# Allegro board HI2XXMDK.brd
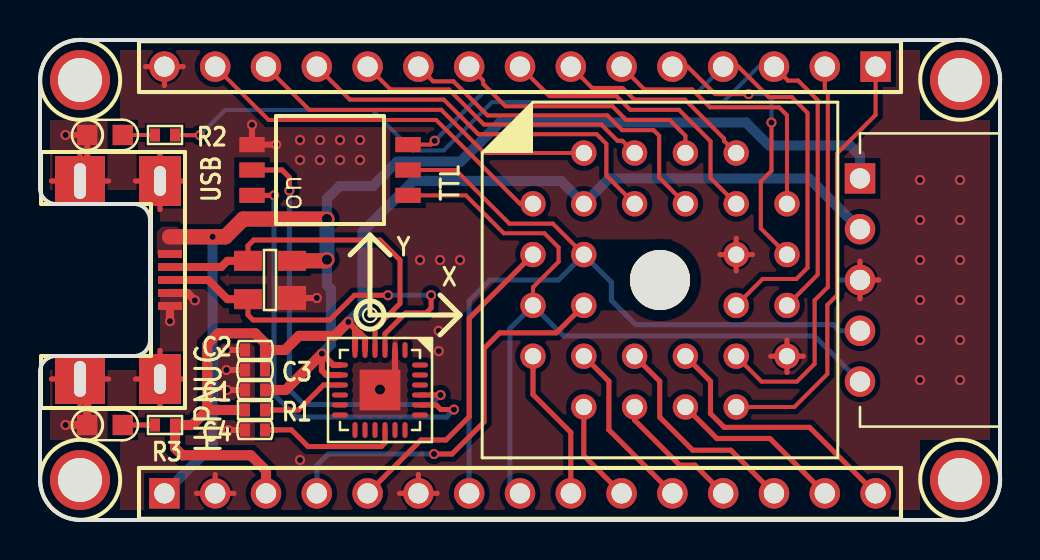
[diagram p0: board, top side]
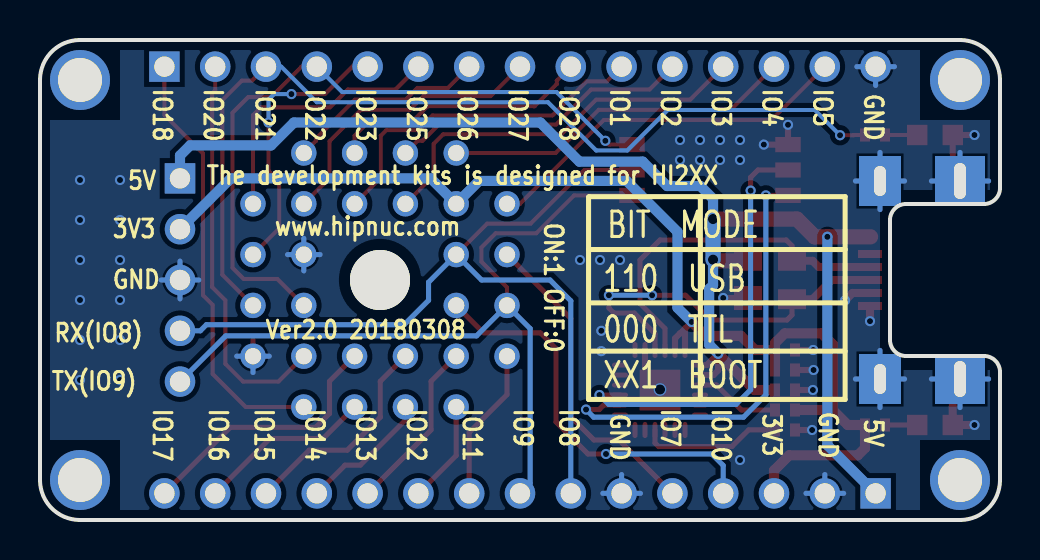
[diagram p1: board, bottom side, seen from below]

Outline 48 x 24 mm; copper layers: TOP, BOTTOM. Coordinates in mm from the lower left corner of the outline.
Outline path: 0,22 arc(0.59,23.41) 2,24 46,24 arc(47.41,23.41) 48,22 48,2 arc(47.41,0.59) 46,0 2,0 arc(0.59,0.59) 0,2 0,7.4 arc(0.23,7.97) 0.8,8.2 4.7,8.2 arc(5.27,8.43) 5.5,9 5.5,15 arc(5.27,15.57) 4.7,15.8 0.8,15.8 arc(0.23,16.03) 0,16.6 0,22

## Placement (name value [footprint] x y rotation side)
C1  4.7uF  [C0402]  10.75 6.5 0 top
C2  0.1uF  [C0402]  10.75 8.5 0 top
C3  4.7uF  [C0402]  10.75 7.5 0 top
C4  4.7uF  [C0402]  10.75 4.5 0 top
D2  GREEN  [LED0603]  3.25 19.25 180 top
D3  SP0503BAHT  [SOT-143]  11.5 12 90 top
D4  RED  [LED0603]  3.25 4.75 180 top
H1  HOLE  [HOLE-2-MM]  46 2 0 top
H2  HOLE  [HOLE-2-MM]  2 22 0 top
H3  HOLE  [HOLE-2-MM]  46 22 0 top
H4  HOLE  [HOLE-2-MM]  2 2 0 top
J1  MICRO_USB  [MICRO-USB-B-476420001]  2 12 270 top
J2  PLCC28  [PLCC28_DIP]  31 12 0 top
J3  CONN PLUG 5  [XH2_54-5P]  41 12 270 top
J4  HEADER 15  [HEADER1X15-2_54MM]  24 1.33 0 top
J5  HEADER 15  [HEADER1X15-2_54MM]  24 22.67 180 top
R1  4.7K  [R0402]  10.75 5.5 180 top
R2  330R  [R0402]  6.25 19.25 180 top
R3  330R  [R0402]  6.25 4.75 180 top
SW1  SW DIP-3  [SMDSW2X3-1_27MM]  14.5 17.5 180 top
U1  CP2104  [QFN-24_4X4MM_P0_5]  17 6.5 270 top

## Library data of the parts
C1-C4 = Capacity_Nonpolarity
D2 D4 = LED
D3 = SP0503BAHT
H1-H4 = HOLE
J1 = MICRO-USB
J2 = PLCC28_DIP
J3 = CONN PLUG 5
J4 J5 = HEADER 15
R1-R3 = Res
SW1 = SW DIP-3
U1 = CP2104

## Footprints (pads in the part's own frame, mm; a bottom-side part is the same pattern mirrored in y, then rotated)
C0402
  rect 0.5x0.65 smd: 1(-0.5,0) 2(0.5,0)
HEADER1X15-2_54MM
  rect 1.524x1.524 hole 1.016: 1(-17.78,0)
  round 1.524 hole 1.016: 2(-15.24,0) 3(-12.7,0) 4(-10.16,0) 5(-7.62,0) 6(-5.08,0) 7(-2.54,0) 8(0,0) 9(2.54,0) 10(5.08,0) 11(7.62,0) 12(10.16,0) 13(12.7,0) 14(15.24,0) 15(17.78,0)
HOLE-2-MM
  round 3 hole 2.2: 1(0,0)
LED0603
  rect 1.016x1.016 smd: 1(-0.889,0) 2(0.889,0)
MICRO-USB-B-476420001
  rect 0.4x1.2 smd: 1(-1.3,4.5) 2(-0.65,4.5) 3(0,4.5) 4(0.65,4.5) 5(1.3,4.5)
  rect 2.5x2.1 hole 1.5x0.6: 6(4.95,4) 9(-4.95,4)
  rect 2.5x2.5 hole 1.8x0.6: 7(4.95,0) 8(-4.95,0)
PLCC28_DIP
  round 3 hole 3.6 unplated: (0,0)
  round 1.27 hole 0.813: 1(1.27,3.81) 2(-1.27,6.35) 3(-1.27,3.81) 4(-3.81,6.35) 5(-6.35,3.81) 6(-3.81,3.81) 7(-6.35,1.27) 8(-3.81,1.27) 9(-6.35,-1.27) 10(-3.81,-1.27) 11(-6.35,-3.81) 12(-3.81,-6.35) 13(-3.81,-3.81) 14(-1.27,-6.35) 15(-1.27,-3.81) 16(1.27,-6.35) 17(1.27,-3.81) 18(3.81,-6.35) 19(6.35,-3.81) 20(3.81,-3.81) 21(6.35,-1.27) 22(3.81,-1.27) 23(6.35,1.27) 24(3.81,1.27) 25(6.35,3.81) 26(3.81,6.35) 27(3.81,3.81) 28(1.27,6.35)
QFN-24_4X4MM_P0_5
  oval 0.8x0.25 smd: 1(-2,1.25) 2(-2,0.75) 3(-2,0.25) 4(-2,-0.25) 5(-2,-0.75) 6(-2,-1.25) 13(2,-1.25) 14(2,-0.75) 15(2,-0.25) 16(2,0.25) 17(2,0.75) 18(2,1.25)
  oval 0.25x0.8 smd: 7(-1.25,-2) 8(-0.75,-2) 9(-0.25,-2) 10(0.25,-2) 11(0.75,-2) 12(1.25,-2) 19(1.25,2) 20(0.75,2) 21(0.25,2) 22(-0.25,2) 23(-0.75,2) 24(-1.25,2)
  rect 2.032x2.032 smd: 25(0,0)
R0402
  rect 0.5x0.65 smd: 1(-0.5,0) 2(0.5,0)
SMDSW2X3-1_27MM
  rect 1.27x0.76 smd: 1(-3.9,1.27) 2(-3.9,0) 3(-3.9,-1.27) 4(3.9,-1.27) 5(3.9,0) 6(3.9,1.27)
SOT-143
  rect 1.2x1.4 smd: 1(-0.9,-1.1)
  rect 1x1.4 smd: 2(0.96,-1.1) 3(0.96,1.1) 4(-0.96,1.1)
XH2_54-5P
  rect 1.524x1.524 hole 1.016: 1(-5.08,0)
  round 1.524 hole 1.016: 2(-2.54,0) 3(0,0) 4(2.54,0) 5(5.08,0)

## Nets
GND: C1.1 C2.1 C3.1 C4.1 D2.2(-) D3.1 D4.2(-) J1.4(ID) J1.5(GND) J1.6 J1.7 J1.8 J1.9 J2.19 J2.24 J3.3 J4.2 J4.6 J5.15 SW1.4(B3) U1.2(GND) U1.25(EPD)
CP2104_RXD: SW1.6(B1) U1.20(RXD)
CP2104_TXD: SW1.5(B2) U1.21(TXD)
DP3V3: C2.2 C3.2 J2.6 J3.2 J4.3 R1.2 R3.1 U1.5(VIO) U1.6(VDD)
DP5V: C1.2 D3.2 J1.1(VBUS) J3.1 J4.1 U1.7(REGIN) U1.8(VBUS)
IO1: J2.1 J5.10
IO2: J2.2 J5.11
IO3: J2.3 J5.12
IO4: J2.4 J5.13
IO5: J2.5 J5.14
IO7(SWCLK): J2.7 J4.5
IO8(MCU_RXD): J2.8 J3.4 J4.7 SW1.2(A2)
IO9(MCU_TXD): J2.9 J3.5 J4.8 SW1.1(A1)
IO10(SWDIO): J2.10 J4.4
IO11: J2.11 J4.9
IO12: J2.12 J4.10
IO13: J2.13 J4.11
IO14: J2.14 J4.12
IO15: J2.15 J4.13
IO16: J2.16 J4.14
IO17: J2.17 J4.15
IO18: J2.18 J5.1
IO20(RESET): J2.20 J5.2
IO21: J2.21 J5.3 R2.1
IO22: J2.22 J5.4 SW1.3(A3)
IO23: J2.23 J5.5
IO25: J2.25 J5.6
IO26: J2.26 J5.7
IO27: J2.27 J5.8
IO28: J2.28 J5.9
USB_DN: D3.3 J1.2(DN) U1.4(D-)
USB_DP: D3.4 J1.3(DP) U1.3(D+)
N02371: C4.2 U1.16(VPP)
N03180: R1.1 U1.9(R\S\T\)
N03555: D2.1(+) R2.2
N94151: D4.1(+) R3.2

Pads without a net: H1 1; H2 1; H3 1; H4 1; U1 1 10 11 12 13 14 15 17 18 19 22 23 24

## Via types
v1: diameter 0.508, hole 0.305, TOP to BOTTOM, 51 vias
v2: diameter 0.635, hole 0.508, TOP to BOTTOM, 3 vias

## Routing (per net, layer and track width the routed paths; a pad name or vN(x,y) marks a point on that pad's centre or on a via; arc(x,y) is an arc through that point)
GND: length 92.7
  TOP w0.254: 0.57,7.05 J1.7 ; J1.7 3.43,7.05 ; J1.7 2,5.62 ; 34.81,12.46 J2.24 ; J2.24 34,13.27 ; J2.24 35.62,13.27 ; J2.24 34.81,14.08 ; 4.77,7.05 J1.6 ; J1.6 7.23,7.05 ; J1.6 6,8.48 ; J1.6 6,5.62 ; 0.57,16.95 J1.8 ; J1.8 3.43,16.95 ; J1.8 2,18.38 ; J5.15 7.16,22.67 ; J5.15 6.22,21.73 ; J5.15 5.28,22.67 ; J1.9 6,18.38 ; J1.9 7.23,16.95 ; J1.9 4.77,16.95 ; J1.9 6,15.52 ; 41,11.06 J3.3 ; J3.3 41.94,12 ; J3.3 41,12.94 ; 36.54,8.19 J2.19 ; J2.19 38.16,8.19 ; J2.19 37.35,9 ; J2.19 37.35,7.38 ; J4.6 18.92,2.27 ; J4.6 19.86,1.33 ; J4.6 17.98,1.33 ; J4.2 8.76,2.27 ; J4.2 9.7,1.33 ; J4.2 7.82,1.33
  TOP w0.305: C1.1 v1(9.36,6.5) ; D3.1 v1(13.84,11.1) ; C4.1 v1(9.39,4.5) ; v2(17,6.52) U1.25 17.75,7.25 U1.2 ; J1.8 2.36,17.31 D2.2 v1(1.28,19.25) ; C2.1 v1(9.34,8.5) ; v1(10.6,19.76) SW1.4 v1(11.81,18.77) ; C3.1 v1(9.32,7.5)
  TOP w0.406: v1(7.74,10.98) 7.38,11.35 J1.4 ; J1.5 v1(6.5,9.94) ; v1(1.28,4.75) D4.2 2.36,6.69 J1.7
  BOTTOM w0.254: 34,13.27 J2.24 ; J2.24 34.81,14.08 ; J2.24 35.62,13.27 ; J2.24 34.81,12.46 ; J1.8 3.43,16.95 ; J1.8 2,18.38 ; J1.8 0.57,16.95 ; J1.9 6,18.38 ; J1.9 6,15.52 ; J1.9 7.23,16.95 ; J1.9 4.77,16.95 ; 17.98,1.33 J4.6 ; J4.6 18.92,2.27 ; J4.6 19.86,1.33 ; J5.15 7.16,22.67 ; J5.15 6.22,21.73 ; J5.15 5.28,22.67 ; 2,5.62 J1.7 ; J1.7 0.57,7.05 ; J1.7 3.43,7.05 ; J3.3 41,12.94 ; J3.3 41.94,12 ; J3.3 41,11.06 ; J3.3 40.06,12 ; J4.2 9.7,1.33 ; J4.2 7.82,1.33 ; J4.2 8.76,2.27 ; J2.19 38.16,8.19 ; J2.19 37.35,7.38 ; J2.19 36.54,8.19 ; J1.6 6,8.48 ; J1.6 6,5.62 ; J1.6 7.23,7.05 ; J1.6 4.77,7.05
  vias: v1(13,19) v1(13,18) v1(13,3) v1(14,19) v1(14,18) v1(15,19) v1(15,18) v1(16,19) v1(16,18) v1(19,13) v1(19.94,9.46) v1(19.94,8.44) v1(20,13) v1(21,13) v1(44,17) v1(44,15) v1(44,13) v1(44,11) v1(44,9) v1(44,7) v1(46,17) v1(46,15) v1(46,13) v1(46,11) v1(46,9) v1(46,7)
CP2104_RXD: length 22.5
  TOP w0.254: v1(20.7,5.52) 20.04,5.52 19.81,5.75 U1.20 ; v1(11.71,16.23) SW1.6
  BOTTOM w0.254: v1(20.7,5.52) 20.32,5.14 12.82,5.14 11.71,6.26 v1(11.71,16.23)
CP2104_TXD: length 21.7
  TOP w0.254: v1(12.47,16.47) 12.47,17.13 12.1,17.5 SW1.5 ; U1.21 v1(20.03,6.25)
  BOTTOM w0.254: v1(20.03,6.25) 19.55,5.78 13.21,5.78 12.47,6.51 v1(12.47,16.47)
DP3V3: length 59.4
  TOP w0.305: U1.6 15.75,9.57 ; 15.75,9.57 15.99,9.33 16,9.33 16.25,9.08 U1.5 ; 15.75,9.57 v1(15.42,9.9)
  TOP w0.508: C2.2 12.24,8.5 12.95,9.21 14.72,9.21 v1(15.42,9.9) ; C2.2 11.25,8.85 10.76,9.33 8.92,9.33 8.36,8.78 8.36,5.5 ; C2.2 C3.2 ; 8.36,5.5 7.61,4.75 R3.1 6.75,3.6 7.11,3.24 10.54,3.24 11.3,2.47 J4.3 ; 8.36,5.5 R1.2
  BOTTOM w0.508: v1(15.42,9.9) 16.13,10.61 16.13,14.41 18.67,16.95 26.05,16.95 J2.6 28.46,17.08 38.46,17.08 J3.2
DP5V: length 68.5
  TOP w0.305: U1.7 14.66,7.75 v1(14.09,8.32) 14.09,7.48 14.32,7.25 U1.8
  TOP w0.508: C1.2 12.28,6.5 v1(14.09,8.32)
  TOP w0.762: v2(14.35,15.05) 10.16,15.05 9.27,14.16 v1(8.63,14.16) 6.47,14.16 ; v2(14.35,13.02) 14.29,12.96 D3.2
  BOTTOM w0.508: v2(14.35,13.02) 14.35,11.75 14.54,11.55 14.54,8.77 v1(14.09,8.32) ; v2(14.35,15.05) 14.35,16.06 14.98,16.7 16.64,16.7 17.86,17.92 21.03,17.92 22.98,19.87 35.3,19.87 36.45,18.73 40.49,18.73 41,18.22 J3.1 ; J4.1 8.63,3.74 v1(8.63,14.16)
  BOTTOM w0.762: v2(14.35,15.05) v2(14.35,13.02)
IO1: length 17.4
  TOP w0.203: J5.10 19.66,21.93 20.67,21.93 22.37,20.23 28.37,20.23 29.11,19.49 30.68,19.49 30.96,19.21 30.96,17.12 J2.1
IO2: length 15.1
  TOP w0.203: J2.2 29.12,18.96 28.88,18.96 28.06,19.77 22.2,19.77 20.44,21.52 17.52,21.52 J5.11
IO3: length 19.7
  TOP w0.203: J2.3 28.32,17.22 28.32,18.81 27.84,19.29 21.92,19.29 20.19,21.02 15.49,21.02 J5.12
IO4: length 17.7
  TOP w0.203: J2.4 22.22,18.35 20.06,20.51 13.46,20.51 J5.13
IO5: length 18.7
  TOP w0.203: J5.14 11.43,20 19.81,20 24,15.81 J2.5
IO7(SWCLK): length 16.1
  TOP w0.254: J2.7 21.46,10.08 21.46,5.16 20.3,4 19.05,4 J4.5
IO8(MCU_RXD): length 42.8
  TOP w0.203: J2.8 25.64,14.82 23.47,14.82 20.79,17.5 SW1.2
  BOTTOM w0.254: J4.7 21.46,10.96 22.5,12 25.92,12 J2.8 28.57,11.89 28.57,10.98 29.79,9.76 39.68,9.76 39.98,9.46 J3.4
IO9(MCU_TXD): length 40.1
  TOP w0.203: SW1.1 21.29,16.23 23.19,14.34 25.22,14.34 25.93,13.63 25.93,12.91 24.65,11.63 J2.9
  BOTTOM w0.254: J4.8 23.49,1.84 23.49,9.57 J2.9 26.17,9.21 38.71,9.21 J3.5
IO10(SWDIO): length 20.2
  TOP w0.254: v1(19.7,3.3) 20.6,3.3 22.2,4.9 22.2,8.57 22.98,9.36 25.82,9.36 J2.10
  BOTTOM w0.254: v1(19.7,3.3) 14.41,3.3 13.84,2.73 J4.4
IO11: length 7.6
  TOP w0.254: J4.9 26.54,4.38 24.65,6.27 J2.11
IO12: length 5.1
  TOP w0.254: J2.12 27.19,3.22 J4.10
IO13: length 8.7
  TOP w0.254: J2.13 28.45,6.93 28.45,4.51 J4.11
IO14: length 6.6
  TOP w0.254: J2.14 29.73,5 31.98,2.74 32.75,2.74 J4.12
IO15: length 10.9
  TOP w0.254: J4.13 34.54,3.49 32.64,3.49 30.98,5.14 30.98,6.93 J2.15
IO16: length 8.8
  TOP w0.254: J2.16 33.84,4.08 36.5,4.08 J4.14
IO17: length 13.3
  TOP w0.254: J2.17 33.52,6.93 33.52,5.32 34.21,4.63 38.48,4.63 J4.15
IO18: length 21.6
  TOP w0.203: J2.18 37.72,5.65 39.37,7.3 39.37,10.76 39.85,11.24 39.85,18.32 41.78,20.26 J5.1
IO20(RESET): length 20
  TOP w0.203: J2.20 36.08,6.92 37.84,6.92 38.73,7.81 38.73,10.98 39.39,11.64 39.39,21.33 39.24,21.48 J5.2
IO21: length 46.8
  TOP w0.203: v1(8,19.24) 7.31,19.24 7.3,19.25 R2.1 ; J2.21 38.88,12.26 38.88,20.99 37.91,21.97 37.4,21.97 J5.3
  BOTTOM w0.203: v1(8,19.24) 9.26,20.5 16.61,20.5 18.63,18.48 20.19,18.48 22.6,20.89 34.16,20.89 35.94,22.67 J5.3
IO22: length 34.6
  TOP w0.203: J5.4 34.92,22.67 36.45,21.14 37.59,21.14 38.38,20.36 38.38,12.61 37.82,12.05 36.13,12.05 J2.22 ; v1(19.73,18.96) 19.54,18.77 SW1.3
  BOTTOM w0.203: J5.4 32.89,21.4 22.17,21.4 v1(19.73,18.96)
IO23: length 14.1
  TOP w0.203: v1(36.57,19.87) 36.57,17.46 36.04,16.93 36.04,14.58 J2.23 ; v1(35.43,21.3) 33.75,21.3 32.38,22.67 J5.5
  BOTTOM w0.203: v1(35.43,21.3) 36.29,21.3 36.57,21.02 v1(36.57,19.87)
IO25: length 13.7
  TOP w0.203: J5.6 30.22,21.52 32.61,21.52 33.5,20.64 36.95,20.64 37.35,20.24 J2.25
IO26: length 10.1
  TOP w0.203: J2.26 34.2,18.96 34.2,19.07 32.26,21.02 29.71,21.02 29.13,21.6 27.61,21.6 J5.7
IO27: length 14.7
  TOP w0.203: J2.27 33.52,17.09 33.52,18.93 31.95,20.51 29.51,20.51 28.83,21.19 25.47,21.19 J5.8
IO28: length 13.2
  TOP w0.203: J2.28 32.27,19.21 31.48,20 29.31,20 28.62,20.69 23.27,20.69 22.16,21.8 22.16,21.97 J5.9
USB_DN: length 17.9
  TOP w0.25: D3.3 10.4,13.71 10.69,14 17,14 18,13 18,10.83 16.75,9.58 U1.4
  TOP w0.4: J1.2 9.06,12.65 9.37,12.96 D3.3
USB_DP: length 19.1
  TOP w0.25: D3.4 10.4,10.25 10.65,10 14.48,10 15.72,11.24 v1(17.4,11.24) ; v1(19.55,11.24) 19.55,10.6 19.3,10.35 18.29,10.35 17.25,9.31 U1.3
  TOP w0.4: J1.3 8.41,12 9.37,11.04 D3.4
  BOTTOM w0.25: v1(17.4,11.24) v1(19.55,11.24)
N02371: length 7.1
  TOP w0.254: U1.16 17.25,3.85 17.07,3.67 13.4,3.67 12.57,4.51 11.83,4.51 11.82,4.5 C4.2
N03180: length 4.3
  TOP w0.254: R1.1 12.93,5.5 14.18,6.75 U1.9
N03555: length 1.6
  TOP w0.203: R2.2 D2.1
N94151: length 1.6
  TOP w0.254: D4.1 R3.2

## Copper pours and planes (outline as drawn; the poured copper is in the pictures)
GND on TOP: 4,23.5 44,23.5 44,20 47.5,20 47.5,4 44,4 44,0.5 4,0.5 4,4 0.5,4 0.5,7.5 6,7.5 6,16.5 0.5,16.5 0.5,20 4,20 ; 38 cut-outs
GND on BOTTOM: 4,23.5 44,23.5 44,20 47.5,20 47.5,4 44,4 44,0.5 4,0.5 4,4 0.5,4 0.5,7.5 6,7.5 6,16.5 0.5,16.5 0.5,20 4,20 ; 12 cut-outs
DP5V on TOP: 5.84,13.27 5.84,14.41 6.09,14.67 6.86,14.67 7.11,14.41 7.11,13.27

## Text on the board
Ref Des/Silkscreen Bottom: www.hipnuc.com | Ver2.0 20180308 | The development kits is designed for HI2XX | 5V | 3V3 | GND | RX(IO8) | TX(IO9) | IO5 | IO4 | IO3 | IO10 | IO2 | IO7 | IO1 | IO28 | IO8 | ON:1 OFF:0 | IO9 | IO27 | IO11 | IO26 | IO25 | IO12 | IO23 | IO13 | IO22 | IO14 | IO21 | IO15 | IO16 | IO20 | IO18 | IO17 | BIT  MODE | 110  USB | 000  TTL | XX1  BOOT
Ref Des/Silkscreen Top: Y | X | USB | TTL | HIPNUC
COMPVAL_TYPE_TOP: FIGURE | SIZE | 12.0 | 20.0 | 21.654 | 40.0 | 86.61 | 141.732 | 59.055x23.622 | 70.866x23.622 | DRILL CHART: TOP to BOTTOM | ALL UNITS ARE IN MILS | PLATED | NON-PLATED | QTY | 47 | 3 | 28 | 32 | 4 | 1 | 2
